# EAGLE board PCB v2 (EAGLE 9.7.0)
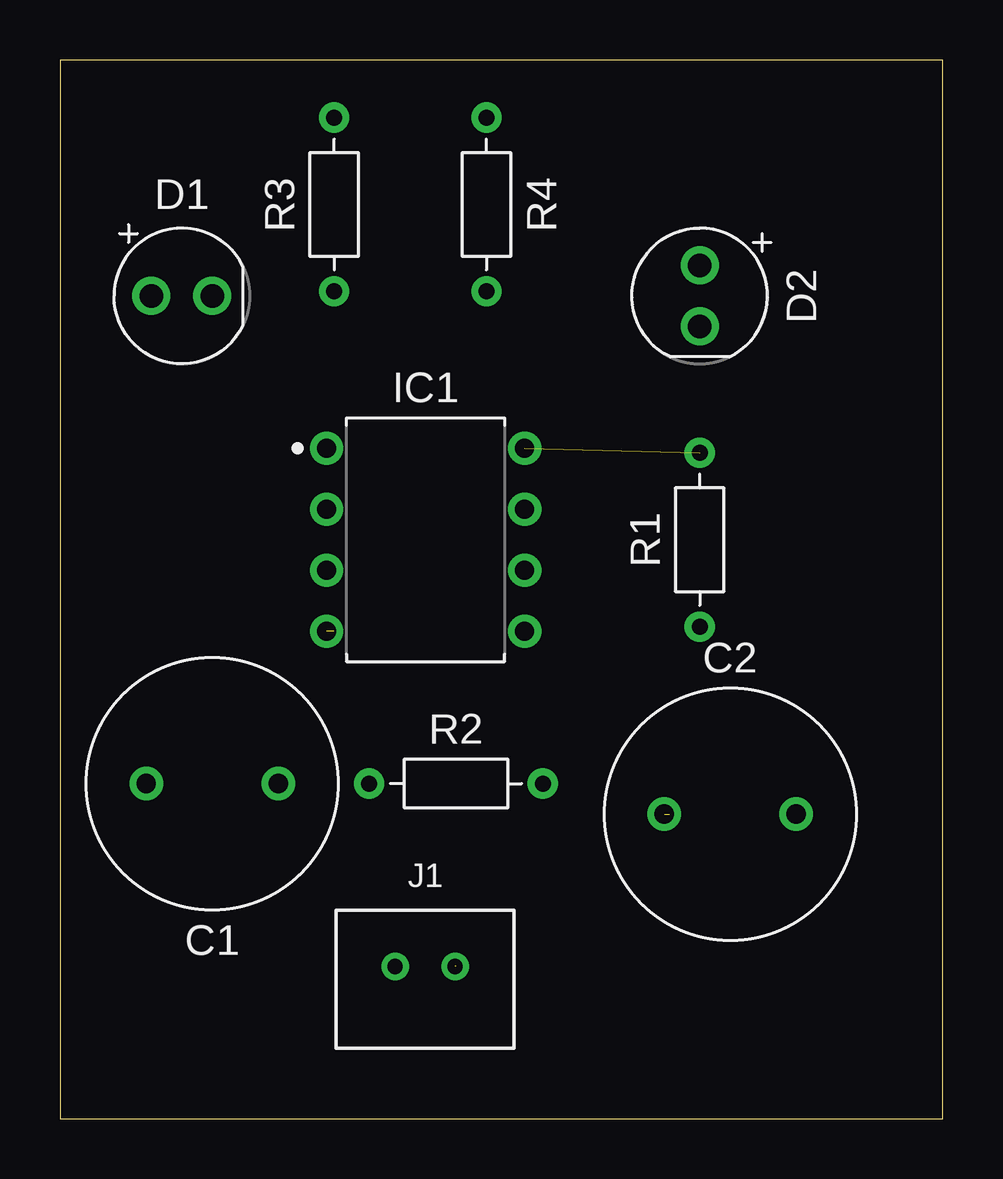
[diagram p0: board, top side]
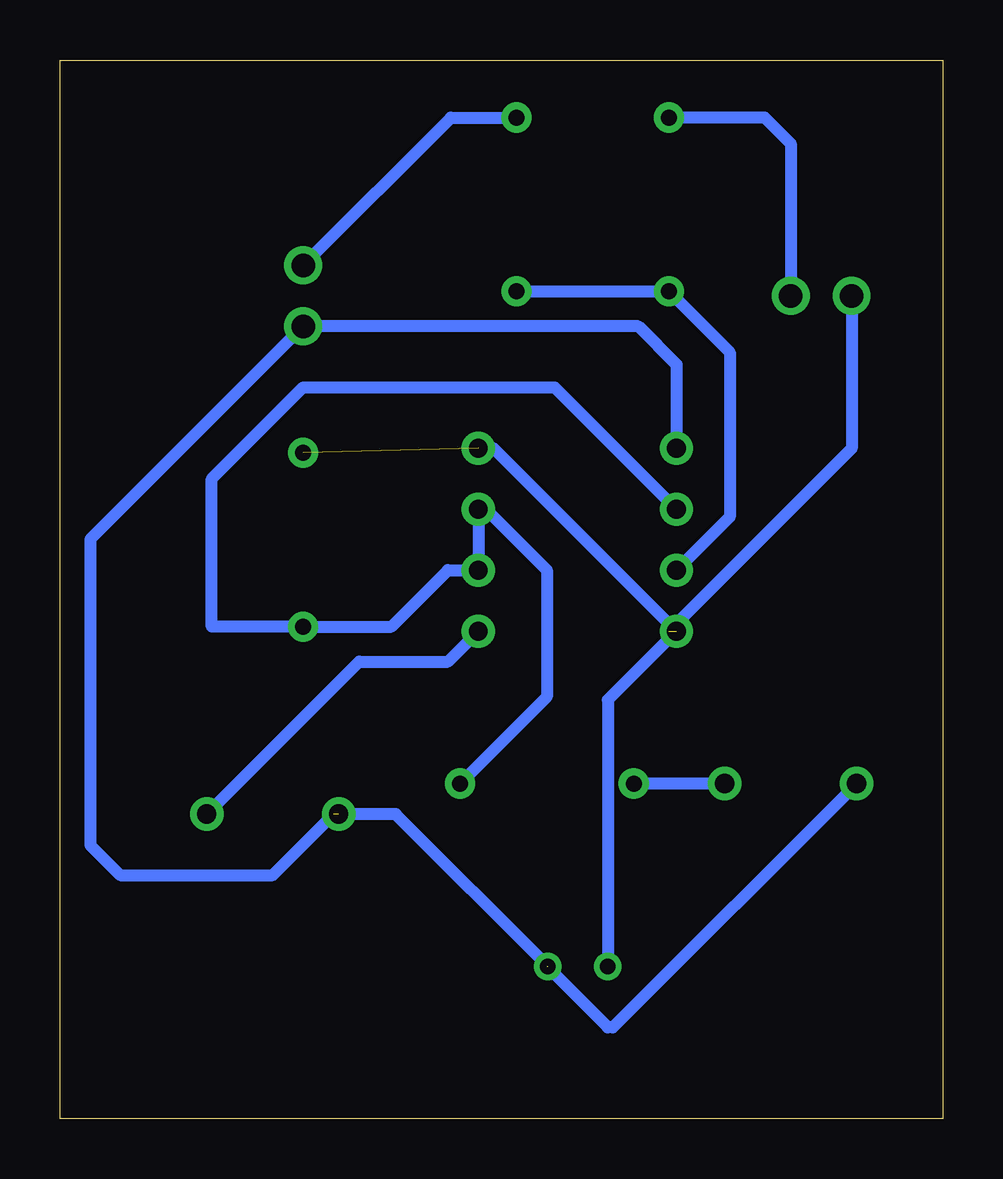
[diagram p1: board, bottom side, seen from below]

Size 36.81 x 44.12 mm. Coordinates in mm from the lower left corner, seen from the top.
Outline: 0,0 36.81,0 36.81,44.12 0,44.12 0,0
Copper layers (1*16): Top / Bottom
Stack-up Default Layer Stack: Top User Defined 0.035mm / Dielectric-1 User Defined 1.5mm / Bottom User Defined 0.035mm
Design rules "default": minimum track width 6mil, minimum drill 0.35mm, track to track 6mil, track to pad 6mil, pad to pad 6mil, via to via 6mil, smd to smd 6mil, copper to edge 40mil, drill to drill 6mil, minimum pad ring 10mil, minimum via ring 8mil, stop-mask expansion 4mil, vias tented up to drill 0mil, thermal gap 10mil

## Footprints (pad centres in the part's own frame; a part is rotated, then mirrored left to right if it is on the bottom)
CAPRD550W60D1025H1250B = drill 0.8 pad 1.4: 1 -2.75,0; 2 2.75,0
LEDRD254W60D565H860B = drill 0.981 pad 1.581: 1 -1.27,0; 2 1.27,0
LEDRD254W60D565H860B_G = drill 0.981 pad 1.581: 1 -1.27,0; 2 1.27,0
P(R-PDIP-T8) = drill 0.786 pad 1.386: 1 -4.13,3.81; 2 -4.13,1.27; 3 -4.13,-1.27; 4 -4.13,-3.81; 5 4.13,-3.81; 6 4.13,-1.27; 7 4.13,1.27; 8 4.13,3.81
B2B-XH-A = drill 0.64: 1 0,0; 2 2.5,0
RESAD724W46L381D178B = drill 0.66 pad 1.26: 1 -3.62,0; 2 3.62,0

## Placement (x,y rotation side)
C1  1uF  [CAPRD550W60D1025H1250B]  6.35,13.97 180 top
C2  10Nf  [CAPRD550W60D1025H1250B]  27.94,12.7 0 top
D1  LED_RED  [LEDRD254W60D565H860B]  5.08,34.29 0 top
D2  LED_GREEN  [LEDRD254W60D565H860B_G]  26.67,34.29 270 top
IC1  LM555NR-PDIP-T8  [P(R-PDIP-T8)]  15.24,24.13 0 top
J1  3A/250V  [B2B-XH-A]  13.97,6.35 0 top
R1  1K  [RESAD724W46L381D178B]  26.67,24.13 90 top
R2  470  [RESAD724W46L381D178B]  16.51,13.97 0 top
R3  220  [RESAD724W46L381D178B]  11.43,38.1 90 top
R4  220  [RESAD724W46L381D178B]  17.78,38.1 270 top

## Library data of the parts
C1 C2 = Tutorial - Fusion 360; CATEGORY: Capacitor
D1 = Opto-Electronic; CATEGORY: Opto-Electronic; SUB-CATEGORY: LED
D2 = Library
IC1 = Tutorial - Fusion 360
J1 = Connector; CATEGORY: CONNECTOR; DESCRIPTION: 2.5mm pitch/disconnectable crimp style connector; MANUFACTURER: JST (XH CONNECTOR); MPN: B2B-XH-A; OPERATING_TEMPERATURE: -25°C ~ 85°C; PART_STATUS: ACTIVE; ROHS_COMPLIANT: COMPLIANT; SERIES: B_B-XH-A; SUB_CATEGORY: Through hole connector; TYPE: top entry
R1-R4 = Tutorial - Fusion 360; CATEGORY: Resistor; SUB-CATEGORY: Fixed

## Nets
+V: D1.1 IC1.4 IC1.8 J1.1 R1.2
GND: C1.2 C2.1 D2.2 IC1.1 J1.2
N$1: IC1.2 IC1.6 IC1.7 R1.1 R2.2
N$2: C1.1 R2.1
N$3: C2.2 IC1.5
N$4: IC1.3 R3.1 R4.2
N$5: D1.2 R3.2
N$6: D2.1 R4.1

## Tracks (layer width: path | path; a pad name or v marks a point on that pad's centre or on a via)
+V  (2 unrouted)
  Bottom 0.508: D1.1 3.81,27.94 11.43,20.32 | J1.1 13.97,17.46 IC1.4 18.73,27.94 IC1.8
GND  (2 unrouted)
  Bottom 0.508: C1.2 13.76,3.81 13.97,3.81 16.51,6.35 | IC1.1 11.11,31.43 12.7,33.02 D2.2 35.54,24.15 35.54,11.41 34.29,10.16 27.94,10.16 25.4,12.7 | J1.2 22.82,12.7 C2.1
N$1
  Bottom 0.508: IC1.2 16.19,30.48 26.67,30.48 30.48,26.67 30.48,20.51 R1.1 22.99,20.51 20.64,22.86 IC1.6 IC1.7 19.05,25.4 16.51,22.86 16.51,17.59 R2.2
N$2
  Bottom 0.508: C1.1 R2.1
N$3
  Bottom 0.508: C2.2 24.34,19.05 20.64,19.05 IC1.5
N$4
  Bottom 0.508: R4.2 R3.1 8.89,31.94 8.89,25.08 IC1.3
N$5
  Bottom 0.508: D1.2 6.35,40.64 7.43,41.72 R3.2
N$6
  Bottom 0.508: D2.1 20.51,41.72 R4.1